# EAGLE board multipleBoards_V1 (EAGLE 5.11)
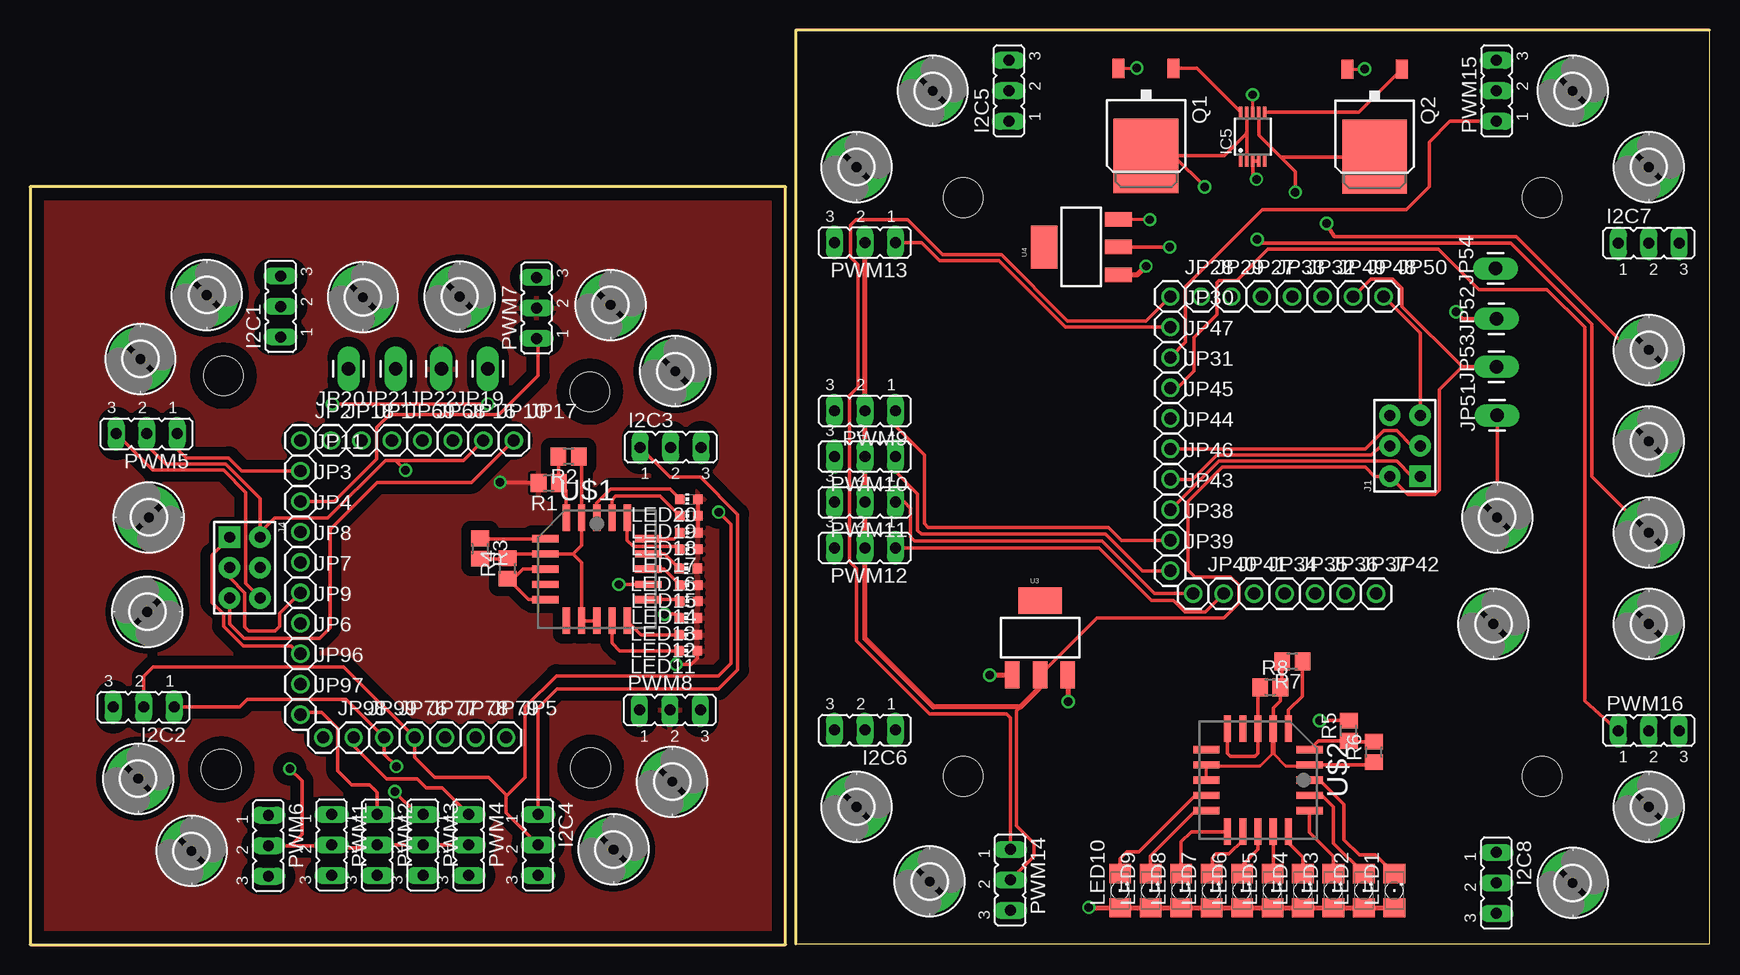
[diagram p0: board, top side]
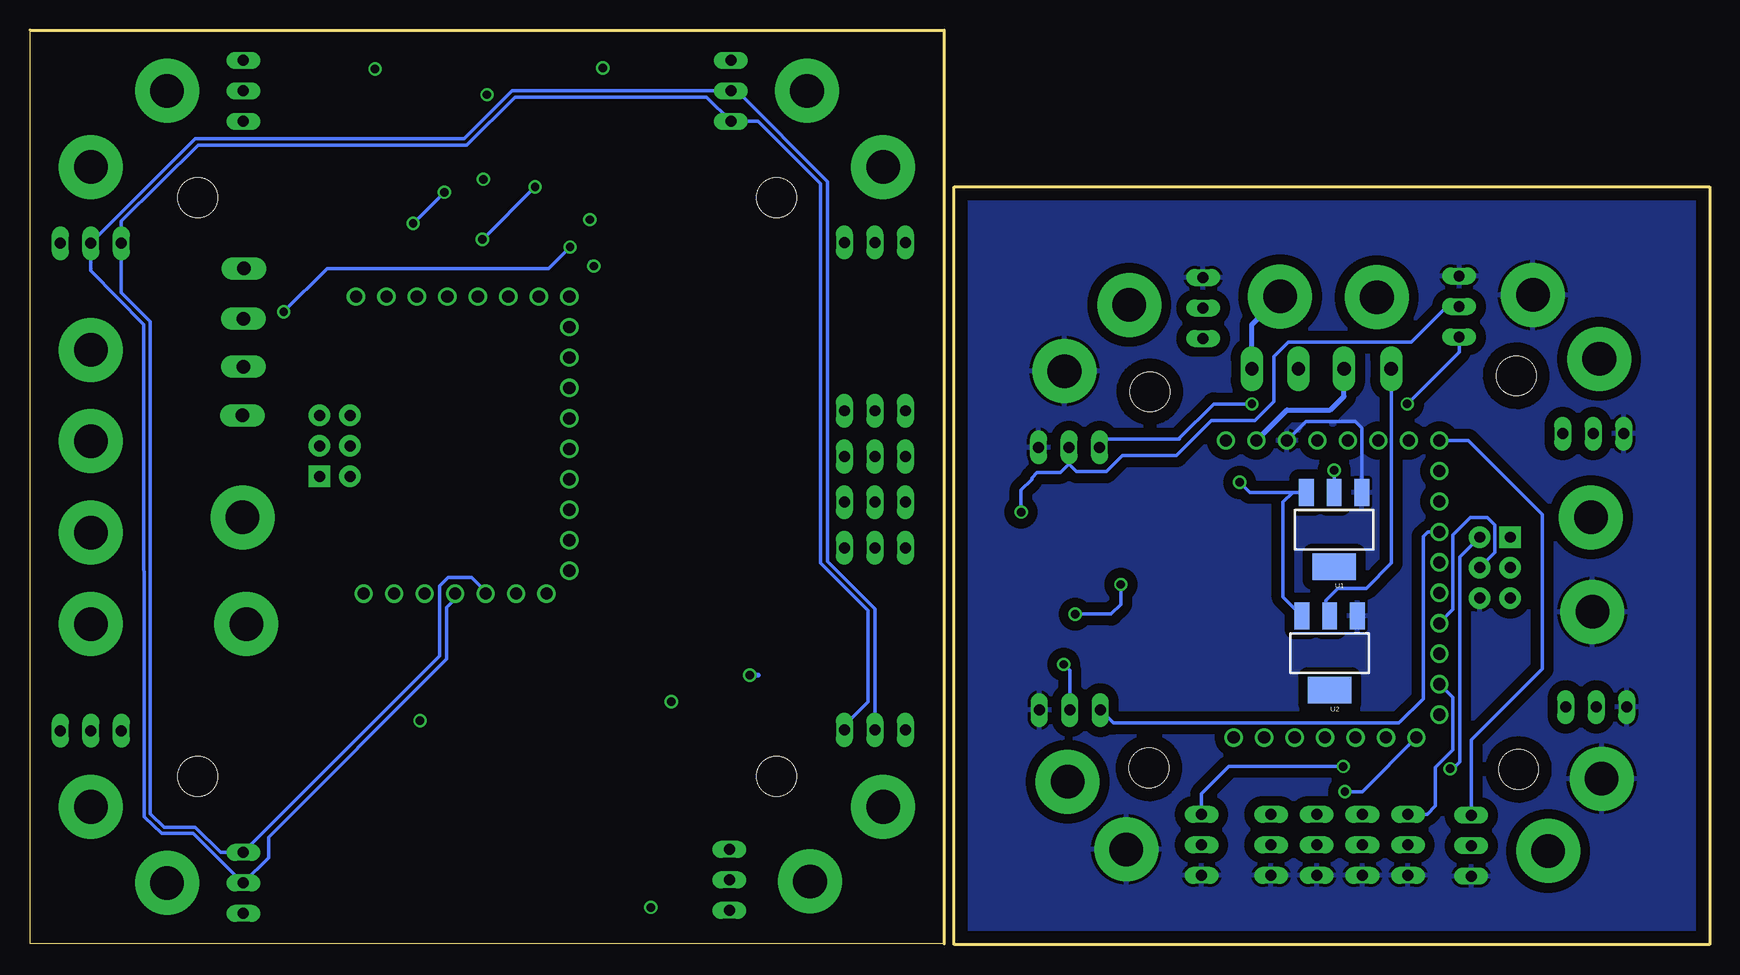
[diagram p1: board, bottom side, seen from below]

Size 140.02 x 76.26 mm. Coordinates in mm from the lower left corner, seen from the top.
Outline: 0,0 62.99,0 62.99,63.18 0,63.18 0,0
Outline: 63.82,0.06 140.02,0.06 140.02,76.26 63.82,76.26 63.82,0.06
Copper layers (1*16): Top 0.035mm / dielectric 1.5mm / Bottom 0.035mm
Design rules "default": minimum track width 10mil, minimum drill 24mil, track to track 8mil, track to pad 8mil, pad to pad 8mil, via to via 8mil, smd to smd 8mil, copper to edge 40mil, drill to drill 8mil, minimum pad ring 10mil, minimum via ring 8mil, stop-mask expansion 4mil, vias tented up to drill 0mil, thermal gap 10mil

## Footprints (pad centres in the part's own frame; a part is rotated, then mirrored left to right if it is on the bottom)
2,8-PAD = drill 2.8 pad 5.334 round: B2,8 0,0
JP2 = drill 0.914 long: 1 -2.54,0; 2 0,0; 3 2.54,0
MSOP10 = smd 0.31 x 0.9: 1 -1,-2.05; 2 -0.5,-2.05; 3 0,-2.05; 4 0.5,-2.05; 5 1,-2.05; 6 1,2.05; 7 0.5,2.05; 8 0,2.05; 9 -0.5,2.05; 10 -1,2.05
HEAD3X2 = drill 0.914 pad 1.778 square: 1 0,0 | drill 0.914 pad 1.778 round: 2 0,2.54; 3 2.54,0; 4 2.54,2.54; 5 5.08,0; 6 5.08,2.54
1X01 = drill 1.016 round: 1 0,0
STAND-OFF = hole 3.302: 0,0
1X01_LONGPAD = drill 1.118 pad 1.88 long: 1 0,0
1206 = smd 1.6 x 1.803: A -1.422,0; C 1.422,0
CHIP-LED0603 = smd 0.8 x 0.8: A 0,-0.75; C 0,0.75
D-PAK_TO252AA = smd 1 x 1.6: 1 -2.28,-4.8; 3 2.28,-4.8 | smd 5.4 x 6.2: 4 0,2.5
R0805 = smd 1.3 x 1.5: 1 -0.85,0; 2 0.85,0
SOT223 = smd 1.219 x 2.235: 1 -2.311,-3.099; 2 0,-3.099; 3 2.311,-3.099 | smd 3.6 x 2.2: 4 0,3.099
PLCC20S = smd 0.6 x 2.2: 1 0,4.3; 2 -1.27,4.3; 3 -2.54,4.3; 9 -2.54,-4.3; 10 -1.27,-4.3; 11 0,-4.3; 12 1.27,-4.3; 13 2.54,-4.3; 19 2.54,4.3; 20 1.27,4.3 | smd 2.2 x 0.6: 4 -4.3,2.54; 5 -4.3,1.27; 6 -4.3,0; 7 -4.3,-1.27; 8 -4.3,-2.54; 14 4.3,-2.54; 15 4.3,-1.27; 16 4.3,0; 17 4.3,1.27; 18 4.3,2.54

## Placement (x,y rotation side)
H1  MOUNT-PAD-ROUND2.8  [2,8-PAD]  9.91,35.62 270 top
H2  MOUNT-PAD-ROUND2.8  [2,8-PAD]  9.78,27.75 270 top
H3  MOUNT-PAD-ROUND2.8  [2,8-PAD]  53.53,13.59 0 top
H4  MOUNT-PAD-ROUND2.8  [2,8-PAD]  48.64,7.94 0 top
H5  MOUNT-PAD-ROUND2.8  [2,8-PAD]  48.39,53.34 0 top
H6  MOUNT-PAD-ROUND2.8  [2,8-PAD]  53.78,47.82 0 top
H7  MOUNT-PAD-ROUND2.8  [2,8-PAD]  9.21,48.83 0 top
H8  MOUNT-PAD-ROUND2.8  [2,8-PAD]  14.73,54.17 0 top
H9  MOUNT-PAD-ROUND2.8  [2,8-PAD]  13.46,7.81 0 top
H10  MOUNT-PAD-ROUND2.8  [2,8-PAD]  9.02,13.84 0 top
H11  MOUNT-PAD-ROUND2.8  [2,8-PAD]  134.94,11.49 0 top
H12  MOUNT-PAD-ROUND2.8  [2,8-PAD]  128.59,5.14 0 top
H13  MOUNT-PAD-ROUND2.8  [2,8-PAD]  27.75,53.98 0 top
H14  MOUNT-PAD-ROUND2.8  [2,8-PAD]  134.94,34.35 0 top
H15  MOUNT-PAD-ROUND2.8  [2,8-PAD]  35.81,54.04 0 top
H16  MOUNT-PAD-ROUND2.8  [2,8-PAD]  134.94,26.73 0 top
H17  MOUNT-PAD-ROUND2.8  [2,8-PAD]  128.59,71.18 0 top
H18  MOUNT-PAD-ROUND2.8  [2,8-PAD]  134.94,64.83 0 top
H19  MOUNT-PAD-ROUND2.8  [2,8-PAD]  68.9,64.83 0 top
H20  MOUNT-PAD-ROUND2.8  [2,8-PAD]  75.25,71.18 0 top
H21  MOUNT-PAD-ROUND2.8  [2,8-PAD]  74.99,5.27 0 top
H22  MOUNT-PAD-ROUND2.8  [2,8-PAD]  68.9,11.49 0 top
H23  MOUNT-PAD-ROUND2.8  [2,8-PAD]  134.94,49.59 0 top
H24  MOUNT-PAD-ROUND2.8  [2,8-PAD]  134.94,41.97 0 top
H25  MOUNT-PAD-ROUND2.8  [2,8-PAD]  122.3,35.62 0 top
H26  MOUNT-PAD-ROUND2.8  [2,8-PAD]  121.98,26.73 0 top
I2C1  [JP2]  20.89,53.21 90 top
I2C2  [JP2]  9.46,19.81 180 top
I2C3  [JP2]  53.4,41.47 0 top
I2C4  [JP2]  42.35,8.32 270 top
I2C5  [JP2]  81.6,71.18 90 top
I2C6  [JP2]  69.6,17.91 180 top
I2C7  [JP2]  134.94,58.48 0 top
I2C8  [JP2]  122.24,5.14 270 top
IC5  LTC4416EMS  [MSOP10]  101.92,67.37 0 top
J1  HEAD3X2  [HEAD3X2]  115.89,39.05 90 top
J4  HEAD3X2  [HEAD3X2]  16.64,33.97 270 top
JP1  M01PTH  [1X01]  27.62,42.04 0 top
JP2  M01PTH  [1X01]  22.54,42.04 0 top
JP3  M01PTH  [1X01]  22.54,36.96 0 top
JP4  M01PTH  [1X01]  22.54,34.42 0 top
JP5  M01PTH  [1X01]  39.69,17.27 0 top
JP6  M01PTH  [1X01]  22.54,24.26 0 top
JP7  M01PTH  [1X01]  22.54,29.34 0 top
JP8  M01PTH  [1X01]  22.54,31.88 0 top
JP9  M01PTH  [1X01]  22.54,26.8 0 top
JP10  M01PTH  [1X01]  37.78,42.04 0 top
JP11  M01PTH  [1X01]  22.54,39.5 0 top
JP12  STAND-OFF  [STAND-OFF]  46.74,14.73 0 top
JP13  STAND-OFF  [STAND-OFF]  15.94,14.61 0 top
JP14  STAND-OFF  [STAND-OFF]  46.67,46.1 0 top
JP15  STAND-OFF  [STAND-OFF]  16.13,47.43 0 top
JP16  M01PTH  [1X01]  35.24,42.04 0 top
JP17  M01PTH  [1X01]  40.32,42.04 0 top
JP18  M01PTH  [1X01]  25.08,42.04 0 top
JP19  M01PTH_LONGPAD  [1X01_LONGPAD]  38.16,48.01 180 top
JP20  M01PTH_LONGPAD  [1X01_LONGPAD]  26.54,48.01 180 top
JP21  M01PTH_LONGPAD  [1X01_LONGPAD]  30.48,48.01 180 top
JP22  M01PTH_LONGPAD  [1X01_LONGPAD]  34.29,48.01 180 top
JP23  STAND-OFF  [STAND-OFF]  126.05,14.03 0 top
JP24  STAND-OFF  [STAND-OFF]  77.79,14.03 0 top
JP25  STAND-OFF  [STAND-OFF]  126.05,62.29 0 top
JP26  STAND-OFF  [STAND-OFF]  77.79,62.29 0 top
JP27  M01PTH  [1X01]  100.14,54.04 0 top
JP28  M01PTH  [1X01]  95.06,54.04 0 top
JP29  M01PTH  [1X01]  97.6,54.04 0 top
JP30  M01PTH  [1X01]  95.06,51.5 0 top
JP31  M01PTH  [1X01]  95.06,46.42 0 top
JP32  M01PTH  [1X01]  105.22,54.04 0 top
JP33  M01PTH  [1X01]  102.68,54.04 0 top
JP34  M01PTH  [1X01]  102.04,29.27 0 top
JP35  M01PTH  [1X01]  104.58,29.27 0 top
JP36  M01PTH  [1X01]  107.12,29.27 0 top
JP37  M01PTH  [1X01]  109.66,29.27 0 top
JP38  M01PTH  [1X01]  95.06,33.72 0 top
JP39  M01PTH  [1X01]  95.06,31.18 0 top
JP40  M01PTH  [1X01]  96.96,29.27 0 top
JP41  M01PTH  [1X01]  99.5,29.27 0 top
JP42  M01PTH  [1X01]  112.2,29.27 0 top
JP43  M01PTH  [1X01]  95.06,36.26 0 top
JP44  M01PTH  [1X01]  95.06,41.34 0 top
JP45  M01PTH  [1X01]  95.06,43.88 0 top
JP46  M01PTH  [1X01]  95.06,38.8 0 top
JP47  M01PTH  [1X01]  95.06,48.96 0 top
JP48  M01PTH  [1X01]  110.3,54.04 0 top
JP49  M01PTH  [1X01]  107.76,54.04 0 top
JP50  M01PTH  [1X01]  112.84,54.04 0 top
JP51  M01PTH_LONGPAD  [1X01_LONGPAD]  122.3,44.13 90 top
JP52  M01PTH_LONGPAD  [1X01_LONGPAD]  122.24,52.2 90 top
JP53  M01PTH_LONGPAD  [1X01_LONGPAD]  122.24,48.2 90 top
JP54  M01PTH_LONGPAD  [1X01_LONGPAD]  122.17,56.39 90 top
JP68  M01PTH  [1X01]  32.7,42.04 0 top
JP69  M01PTH  [1X01]  30.16,42.04 0 top
JP76  M01PTH  [1X01]  29.53,17.27 0 top
JP77  M01PTH  [1X01]  32.07,17.27 0 top
JP78  M01PTH  [1X01]  34.61,17.27 0 top
JP79  M01PTH  [1X01]  37.15,17.27 0 top
JP96  M01PTH  [1X01]  22.54,21.72 0 top
JP97  M01PTH  [1X01]  22.54,19.18 0 top
JP98  M01PTH  [1X01]  24.45,17.27 0 top
JP99  M01PTH  [1X01]  26.99,17.27 0 top
LED1  [1206]  113.73,4.51 90 top
LED2  [1206]  111.19,4.51 90 top
LED3  [1206]  108.65,4.51 90 top
LED4  [1206]  106.11,4.51 90 top
LED5  [1206]  103.57,4.51 90 top
LED6  [1206]  101.03,4.51 90 top
LED7  [1206]  98.49,4.51 90 top
LED8  [1206]  95.95,4.51 90 top
LED9  [1206]  93.41,4.51 90 top
LED10  [1206]  90.87,4.51 90 top
LED11  [CHIP-LED0603]  54.86,24.51 90 top
LED12  [CHIP-LED0603]  54.86,25.84 90 top
LED13  [CHIP-LED0603]  54.86,27.24 90 top
LED14  [CHIP-LED0603]  54.93,28.64 90 top
LED15  [CHIP-LED0603]  54.93,29.97 90 top
LED16  [CHIP-LED0603]  54.86,31.37 90 top
LED17  [CHIP-LED0603]  54.93,32.96 90 top
LED18  [CHIP-LED0603]  54.93,34.35 90 top
LED19  [CHIP-LED0603]  54.93,35.75 90 top
LED20  [CHIP-LED0603]  54.93,37.15 90 top
PWM1  [JP2]  25.15,8.32 270 top
PWM2  [JP2]  28.96,8.32 270 top
PWM3  [JP2]  32.77,8.32 270 top
PWM4  [JP2]  36.58,8.32 270 top
PWM5  [JP2]  9.72,42.61 180 top
PWM6  [JP2]  19.88,8.26 270 top
PWM7  [JP2]  42.23,53.09 90 top
PWM8  [JP2]  53.34,19.56 0 top
PWM9  [JP2]  69.6,44.51 180 top
PWM10  [JP2]  69.6,40.7 180 top
PWM11  [JP2]  69.6,36.89 180 top
PWM12  [JP2]  69.6,33.08 180 top
PWM13  [JP2]  69.6,58.55 180 top
PWM14  [JP2]  81.72,5.4 270 top
PWM15  [JP2]  122.24,71.18 90 top
PWM16  [JP2]  134.94,17.84 0 top
Q1  IRFR5305  [D-PAK_TO252AA]  93.03,68.26 180 top
Q2  IRFR5305  [D-PAK_TO252AA]  112.08,68.2 180 top
R1  12K  [R0805]  43.24,38.48 180 top
R2  2.2K  [R0805]  44.89,40.7 180 top
R3  75K  [R0805]  37.53,33.02 270 top
R4  75K  [R0805]  39.81,31.37 90 top
R5  12K  [R0805]  109.92,17.84 90 top
R6  2.2K  [R0805]  112.01,16.07 90 top
R7  75K  [R0805]  105.22,23.62 180 top
R8  75K  [R0805]  103.38,21.46 0 top
U1  V_REG_317SMD  [SOT223]  31.31,34.61 180 bottom
U2  V_REG_317SMD  [SOT223]  31.69,24.32 180 bottom
U3  V_REG_317SMD  [SOT223]  84.2,25.59 0 top
U4  V_REG_317SMD  [SOT223]  87.63,58.17 90 top
U$1  LM3914SMD  [PLCC20S]  47.24,31.31 0 top
U$2  LM3914SMD  [PLCC20S]  102.36,13.72 270 top

## Library data of the parts
H1-H26 = holes
I2C1-I2C8 PWM1-PWM16 = jumper
IC5 = linear-technology-3
J1 J4 = MyCON2
JP1-JP11 JP16-JP18 JP27-JP50 JP68 JP69 JP76-JP79 JP96-JP99 = DIYdrones3
JP12-JP15 JP19-JP26 JP51-JP54 U1-U4 = SparkFun
LED1-LED20 = led
Q1 Q2 = transistor-power
R1-R8 = resistor
U$1 U$2 = linear

## Nets
GND: H2.B2,8 H4.B2,8 H6.B2,8 H8.B2,8 H10.B2,8 I2C1.3 I2C2.3 I2C3.3 I2C4.3 J4.6 JP16.1 PWM1.3 PWM2.3 PWM3.3 PWM4.3 PWM5.3 PWM6.3 PWM7.3 PWM8.3 U1.1 U2.1
GND1: H12.B2,8 H16.B2,8 H18.B2,8 H20.B2,8 H22.B2,8 H24.B2,8 I2C5.3 I2C6.3 I2C7.3 I2C8.3 IC5.3 IC5.4 J1.6 JP49.1 PWM9.3 PWM10.3 PWM11.3 PWM12.3 PWM13.3 PWM14.3 PWM15.3 PWM16.3 U3.1 U4.1
N$1: R1.1 R2.2 U$1.3
N$2: LED11.C U$1.12
N$3: LED12.C U$1.13
N$4: LED14.C U$1.14
N$5: LED13.C U$1.15
N$6: R5.1 R6.2 U$2.3
N$7: LED15.C U$1.16
N$8: LED16.C U$1.17
N$9: LED18.C U$1.18
N$10: LED17.C U$1.19
N$11: LED19.C U$1.20
N$12: LED20.C U$1.1
N$13: R8.1 U$2.6 U$2.8
N$14: R3.1 U$1.4
N$15: R4.1 U$1.6 U$1.8
N$16: R7.1 U$2.4
N$17: LED10.C U$2.12
N$18: LED9.C U$2.13
N$19: LED8.C U$2.14
N$20: LED7.C U$2.15
N$21: LED6.C U$2.16
N$22: LED5.C U$2.17
N$23: LED4.C U$2.18
N$24: LED3.C U$2.19
N$25: LED2.C U$2.20
N$26: LED1.C U$2.1
N$27: IC5.10 Q1.1
N$28: IC5.6 Q2.1
PB0: JP8.1
PB1: J4.3 JP7.1
PB2: J4.4 JP9.1
PB3: J4.1 JP6.1
PB4: JP96.1 PWM1.1
PB5: JP97.1 PWM2.1
PB6: JP98.1 PWM3.1
PB7: JP99.1 PWM4.1
PB8: JP41.1 PWM12.1
PB9: JP38.1 PWM9.1
PB10: JP39.1 PWM10.1
PB11: JP40.1 PWM11.1
PB12: J1.1 JP43.1
PB13: J1.4 JP46.1
PB14: J1.3 JP44.1
PB15: JP45.1
PC1: JP42.1
PC6: JP5.1
PD0: I2C1.1 I2C2.1 I2C3.1 I2C4.1 JP76.1
PD1: I2C1.2 I2C2.2 I2C3.2 I2C4.2 JP77.1
PD2: JP78.1
PD3: JP79.1
PD4: I2C5.1 I2C6.1 I2C7.1 I2C8.1 JP34.1
PD5: I2C5.2 I2C6.2 I2C7.2 I2C8.2 JP35.1
PD6: JP37.1
PD7: JP36.1
PE: R2.1 R3.2 R4.2 U$1.2 U$1.5 U$1.10 U$1.11
PE0: JP68.1
PE1: JP69.1
PE2: R6.1 R7.2 R8.2 U$2.2 U$2.5 U$2.10 U$2.11
PE3: JP33.1
PE4: JP32.1
PH0: JP1.1
PH1: JP18.1
PH2: JP31.1 PWM16.1
PH3: JP2.1 PWM6.1
PH4: JP11.1 PWM5.1
PH5: JP3.1 PWM7.1
PH6: JP4.1 PWM8.1
PH7: JP30.1 PWM13.1
PH8: JP28.1 PWM14.1
PH9: JP29.1
PH10: JP27.1
PH11: JP47.1 PWM15.1
RESET: J4.5 JP17.1
RESET1: J1.5 JP50.1
V_BATT1: H14.B2,8 IC5.2 IC5.9 Q1.4
V_BATT2: H23.B2,8 IC5.7 Q2.4
VCC: H1.B2,8 H3.B2,8 H5.B2,8 H7.B2,8 H9.B2,8 H13.B2,8 JP22.1 LED11.A LED12.A LED13.A LED14.A LED15.A LED16.A LED17.A LED18.A LED19.A LED20.A PWM7.2 PWM8.2 R1.2 U1.3 U2.3
VCC1: H11.B2,8 H17.B2,8 H19.B2,8 H21.B2,8 H26.B2,8 IC5.8 JP54.1 LED1.A LED2.A LED3.A LED4.A LED5.A LED6.A LED7.A LED8.A LED9.A LED10.A PWM15.2 PWM16.2 Q1.3 Q2.3 R5.2 U3.3 U4.3
VCC_3V1: JP52.1 U4.2
VCC_3V3: JP20.1 U2.2
VCC_5V: J4.2 JP10.1 JP21.1 PWM1.2 PWM2.2 PWM3.2 PWM4.2 PWM5.2 PWM6.2 U1.2
VCC_5V1: J1.2 JP48.1 JP53.1 PWM9.2 PWM10.2 PWM11.2 PWM12.2 PWM13.2 PWM14.2 U3.2
VCC_12V: H15.B2,8 JP19.1
VCC_12V1: H25.B2,8 JP51.1

## Tracks (layer width: path | path; a pad name or v marks a point on that pad's centre or on a via)
GND
  Top 0.305: J4.6 17.97,30.1 17.97,37.72 16.13,39.56 10.22,39.56 PWM5.3
  Bottom 0.305: U1.1 28.99,43.09 29.53,43.62 33.66,43.62 JP16.1
  pour Bottom (isolate 0.813): -0.76,64.01 63.56,63.88 63.69,-0.7 -0.76,-0.83
GND1  (via drill 0.7)
  Top 0.305: IC5.4 IC5.3 101.92,64.14 v102.23,63.82
  Top 0.406: U4.1 92.3,55.85 v93.03,56.58 | U3.1 80.01,22.49 v80.01,22.48
  Bottom 0.406: v93.03,56.58 93.03,56.64 93.28,56.9 | v80.01,22.48 79.31,22.48
N$1
  Top 0.305: U$1.3 44.7,37.87 R1.1 44.04,38.53 R2.2
N$2
  Top 0.305: U$1.12 48.51,25.15 49.15,24.51 LED11.C
N$3
  Top 0.305: U$1.13 50.95,25.84 LED12.C
N$4
  Top 0.305: U$1.14 54.05,28.77 LED14.C
N$5  (via drill 0.7)
  Top 0.305: v49.09,30.04 U$1.15 | v52.9,27.56 53.8,27.56 LED13.C
  Bottom 0.305: v49.09,30.04 49.09,28.38 49.91,27.56 v52.9,27.56
N$6
  Top 0.305: R6.2 110,16.92 R5.1 107.4,16.99 U$2.3
N$7
  Top 0.305: U$1.16 52.84,31.3 LED15.C
N$8
  Top 0.305: U$1.17 52.91,32.58 LED16.C
N$9
  Top 0.305: U$1.18 53.67,33.85 LED18.C
N$10
  Top 0.305: U$1.19 49.78,33.72 50.29,33.21 53.92,33.21 LED17.C
N$11
  Top 0.305: U$1.20 48.51,37.08 48.83,37.4 52.53,37.4 LED19.C
N$12
  Top 0.305: U$1.1 47.24,36.83 48.39,37.97 53.35,37.97 LED20.C
N$13
  Top 0.305: R8.1 102.36,21.3 U$2.6 102.36,15.94 102.11,15.68 100.08,15.68 99.82,15.94 U$2.8
N$14
  Top 0.305: U$1.4 37.55,33.85 R3.1
N$15
  Top 0.305: U$1.8 41.57,28.77 R4.1 40.3,30.52 41.08,31.3 U$1.6
N$16
  Top 0.305: U$2.4 104.9,19.56 106.05,20.7 106.05,23.6 R7.1
N$17
  Top 0.305: U$2.12 97.16,12.45 92.46,7.75 91.44,7.75 90.87,7.18 LED10.C
N$18
  Top 0.305: U$2.13 97.16,11.18 93.41,7.43 LED9.C
N$19
  Top 0.305: U$2.14 96.79,9.42 95.95,8.57 LED8.C
N$20
  Top 0.305: U$2.15 101.09,8.7 99.95,7.56 98.87,7.56 98.55,7.24 98.55,5.99 LED7.C
N$21
  Top 0.305: U$2.16 102.36,7.94 101.09,6.67 101.09,5.99 LED6.C
N$22
  Top 0.305: U$2.17 103.63,5.99 LED5.C
N$23
  Top 0.305: U$2.18 104.9,8.51 106.11,7.3 LED4.C
N$24
  Top 0.305: U$2.19 106.66,9.35 108.65,7.37 LED3.C
N$25
  Top 0.305: U$2.20 107.7,12.45 108.65,11.49 108.65,8.47 LED2.C
N$26
  Top 0.305: U$2.1 107.51,13.72 109.54,11.68 109.54,8.76 110.81,7.49 112.17,7.49 LED1.C
N$27
  Top 0.305: Q1.1 97.28,73.06 IC5.10
N$28
  Top 0.305: IC5.6 110.78,69.42 Q2.1
PB1
  Top 0.305: JP7.1 22.54,29.27 22.48,29.27 20.83,27.62 20.83,26.54 20.45,26.16 18.22,26.16 17.91,26.48 17.91,29.34 16.64,30.61 J4.3
PB2
  Bottom 0.305: J4.4 17.91,32.7 17.91,34.99 18.54,35.62 19.94,35.62 21.4,34.16 21.4,27.94 JP9.1
PB3
  Top 0.305: JP6.1 22.42,24.26 21.78,24.89 17.78,24.89 16.13,26.54 16.13,27.56 15.18,28.51 15.18,32.51 J4.1
PB4
  Bottom 0.305: JP96.1 22.48,21.72 21.4,20.64 21.4,16.26 22.86,14.8 22.86,11.56 23.56,10.86 PWM1.1
PB5
  Top 0.305: PWM2.1 28.96,12.7 28.32,13.34 26.8,13.34 25.65,14.48 25.65,18.03 24.32,19.37 22.73,19.37 JP97.1
PB6  (via drill 0.7)
  Top 0.305: PWM3.1 32.32,10.86 v30.42,12.76
  Bottom 0.305: v30.42,12.76 28.96,12.76 JP98.1
PB7
  Top 0.305: JP99.1 26.99,16.57 29.72,13.84 32.26,13.84 33.02,13.08 34.35,13.08 PWM4.1
PB8
  Top 0.305: PWM12.1 89.09,33.08 93.47,28.7 95.31,28.7 96.27,27.75 97.98,27.75 JP41.1
PB9
  Top 0.305: JP38.1 91,33.72 89.92,34.8 74.87,34.8 74.55,35.12 74.55,40.83 72.14,43.24 PWM9.1
PB10
  Top 0.305: JP39.1 92.71,31.18 89.66,34.23 74.3,34.23 73.98,34.54 73.98,37.59 72.14,39.43 PWM10.1
PB11
  Top 0.305: JP40.1 93.73,29.27 89.34,33.66 73.72,33.66 73.41,33.97 73.41,36.39 72.9,36.89 PWM11.1
PB12
  Top 0.305: J1.1 115.19,39.05 113.92,40.32 99.12,40.32 JP43.1
PB13
  Top 0.305: J1.4 112.59,41.59 111.82,40.83 98.93,40.83 96.9,38.8 JP46.1
PB14
  Top 0.305: J1.3 115.19,41.59 113.92,42.86 112.84,42.86 111.32,41.34 JP44.1
PD0  (via drill 0.7)
  Top 0.305: I2C4.1 42.35,19.75 43.94,21.34 57.4,21.34 58.99,22.92 58.99,35.88 55.88,38.99 53.34,38.99 I2C3.1 | v30.54,14.86 29.53,15.88 JP76.1 26.35,20.45 18.1,20.45 17.46,19.81 I2C2.1 | v38.16,45.09 v25.21,45.09
  Bottom 0.305: v30.54,14.86 40.07,14.86 42.35,12.57 I2C4.1 | I2C3.1 50.16,42.16 44.2,42.16 44.2,42.23 41.34,45.09 v38.16,45.09 | I2C1.1 20.89,49.4 v25.21,45.09
PD1  (via drill 0.7)
  Top 0.305: 39.69,12.38 39.69,12.51 38.23,13.97 33.72,13.97 32.07,15.62 JP77.1 26.16,23.18 10.29,23.18 9.46,22.35 I2C2.2 | 39.69,12.38 39.69,10.99 I2C4.2 | 39.69,12.38 41.27,13.97 41.27,19.81 43.88,22.42 57.4,22.42 58.42,23.43 58.42,35.05 v57.4,36.07
  Bottom 0.305: 53.4,40.07 I2C3.2 | 53.4,40.07 54.1,39.37 56.07,39.37 56.52,38.92 56.52,38.8 57.4,37.91 v57.4,36.07 | 53.4,40.07 52.77,39.43 50.29,39.43 48.96,40.77 44.45,40.77 41.53,43.69 37.91,43.69 36.32,45.28 36.32,49.02 35.12,50.23 24.89,50.23 21.91,53.21 I2C1.2
PD4
  Bottom 0.305: I2C6.1 72.14,18.29 70.17,20.26 70.17,27.88 74.1,31.81 74.1,63.44 79.31,68.64 I2C5.1 83.63,70.67 99.57,70.67 103.63,66.67 125.98,66.67 132.4,60.33 I2C7.1 132.4,54.36 129.98,51.94 129.98,10.92 128.84,9.78 126.24,9.78 124.14,7.68 I2C8.1 105.85,24.07 105.85,29.91 105.16,30.61 103.19,30.61 102.04,29.46 JP34.1
PD5
  Bottom 0.305: I2C6.2 69.6,28 73.53,31.94 73.53,63.63 81.09,71.18 I2C5.2 99.82,71.18 103.82,67.18 126.24,67.18 I2C7.2 134.94,56.2 130.56,51.69 130.49,10.67 129.03,9.27 126.43,9.27 122.3,5.14 I2C8.2 120.14,7.24 120.14,8.95 105.28,23.81 105.28,28.13 104.58,28.83 JP35.1
PE
  Top 0.305: R3.2 39.77,32.17 R4.2 40.17,32.58 U$1.5 45.28,32.58 | U$1.11 U$1.10 45.97,31.88 45.28,32.58 | 45.28,32.58 45.97,33.27 U$1.2 45.97,40.47 R2.1
PE2
  Top 0.254: U$2.11 U$2.10 | 103.63,16 102.55,14.92 98.13,14.92 | U$2.5 103.63,15.94 104.65,14.92 106.6,14.92
  Top 0.305: U$2.2 111.78,14.99 R6.1 | R7.2 104.37,21.61 R8.2 104.23,20.34 103.63,19.75 U$2.5
  Top 0.406: 103.63,16 U$2.5 | U$2.10 98.13,14.92 | 106.6,14.92 U$2.2
PH2
  Top 0.305: PWM16.1 129.6,20.32 129.6,51.5 126.43,54.61 120.78,54.61 117.41,57.98 103.19,57.98 100.58,55.37 99.12,55.37 98.93,55.18 98.93,52.51 97.03,50.61 97.03,47.82 95.63,46.42 JP31.1
PH3
  Bottom 0.305: PWM6.1 19.88,17.08 13.97,22.99 13.97,35.88 20.13,42.04 JP2.1
PH4
  Top 0.305: JP11.1 17.65,39.5 16.57,40.58 13.02,40.58 12.26,41.34 PWM5.1
PH5
  Top 0.305: PWM7.1 42.35,50.42 42.35,47.43 39.12,44.2 29.97,44.2 28.89,43.12 28.89,40.51 25.34,36.96 JP3.1
PH6
  Bottom 0.305: JP4.1 23.5,34.42 23.88,34.04 23.88,20.51 25.91,18.48 49.72,18.48 PWM8.1
PH7
  Top 0.305: PWM13.1 74.3,58.55 75.82,57.02 80.77,57.02 86.3,51.5 JP30.1
PH8
  Top 0.305: PWM14.1 81.72,18.92 81.41,19.24 74.99,19.24 68.9,25.34 68.9,31.37 68.33,31.94 68.33,45.78 69.02,46.48 69.02,56.71 68.39,57.34 68.39,60.01 68.83,60.45 73.15,60.45 76.07,57.53 80.96,57.53 86.49,52.01 93.03,52.01 JP28.1
PH11
  Top 0.305: PWM15.1 118.36,68.64 116.65,66.93 116.65,63.18 114.74,61.28 102.74,61.28 96.33,54.86 96.33,50.23 JP47.1
RESET
  Top 0.305: J4.5 16.64,26.73 17.84,25.53 24.13,25.53 25.02,26.42 25.02,34.61 28.96,38.54 36.83,38.54 JP17.1
RESET1
  Top 0.305: J1.5 115.89,50.99 JP50.1
V_BATT1  (via drill 0.7)
  Top 0.305: IC5.9 IC5.2 101.42,67.68 101.41,67.69 101.41,67.63 99.57,65.79 93.05,65.79 Q1.4 95.34,65.76 v97.92,63.18 | H14.B2,8 134.87,34.35 130.17,39.05 130.17,51.75 123.44,58.48 102.62,58.48 v102.3,58.8
  Bottom 0.305: v97.92,63.18 v102.3,58.8
V_BATT2  (via drill 0.7)
  Top 0.305: IC5.7 102.42,67.51 104.27,65.66 | 104.27,65.66 112.04,65.66 Q2.4 | H23.B2,8 133.35,49.59 123.89,59.05 108.71,59.05 v108.08,60.13 | v105.47,62.74 105.47,64.45 104.27,65.66
  Bottom 0.305: v105.47,62.74 v108.08,60.13
VCC  (via drill 0.7)
  Top 0.305: v39.18,38.54 42.33,38.54 R1.2 | LED16.A 55.68,31.43 | LED18.A LED19.A LED20.A | LED11.A 55.63,24.5 55.63,23.88 55.12,23.37 v53.85,23.37
  Bottom 0.305: 34.75,37.71 38.34,37.71 v39.18,38.54 | 34.75,37.71 U1.3 | 34.75,37.71 35.56,36.89 35.56,28.98 U2.3 | PWM8.2 53.34,22.86 v53.85,23.37
  pour Top (isolate 0.813): -0.7,63.94 63.18,63.82 63.63,-0.76 -0.57,-0.7
VCC1  (via drill 0.7)
  Top 0.254: IC5.8 v101.92,70.87 | Q2.3 111.25,73 v111.25,73.03 | Q1.3 92.27,73.06 v92.27,73.09 | U4.3 93.34,60.48 v93.34,60.45
  Top 0.305: R5.2 107.53,18.69 v107.51,18.67
  Top 0.406: v88.27,3.11 88.27,3.09 LED10.A LED9.A LED8.A LED7.A LED6.A LED5.A LED4.A LED3.A LED2.A LED1.A | U3.3 86.55,22.49 v86.55,20.26
VCC_3V1  (via drill 0.7)
  Top 0.305: JP52.1 119.44,52.2 v118.87,52.77 | U4.2 v95,58.17
  Bottom 0.305: v118.87,52.77 115.25,56.39 96.77,56.39 v95,58.17
VCC_3V3
  Bottom 0.305: JP20.1 26.54,31.81 28.64,29.72 30.99,29.72 32,28.7 32,27.74 U2.2
VCC_5V  (via drill 0.7)
  Top 0.305: PWM4.2 PWM3.2 PWM2.2 29.15,8.32 29.21,8.26 29.08,8.26 28.89,8.06 25.4,8.06 PWM1.2 25.08,8.26 PWM6.2 21.72,8.26 22.67,9.21 22.67,13.65 v21.65,14.67 | PWM5.2 9.72,41.66 11.3,40.07 16.32,40.07 19.18,37.21 J4.2 19.18,34.35 20.38,35.56 24.83,35.56 29.65,40.39 30.48,40.39 | JP10.1 36.13,40.39 30.48,40.39 | 30.48,40.39 v31.31,39.56
  Bottom 0.305: v21.65,14.67 21.4,14.67 20.83,15.24 20.83,32.32 J4.2 | U1.2 30.92,38.09 31.31,38.47 v31.31,39.56
  Bottom 0.406: JP21.1 30.48,45.72 31.62,44.58 35.24,44.58 JP10.1
VCC_5V1
  Top 0.305: 119.38,48.2 JP53.1 | 119.38,48.2 114.36,53.21 114.36,54.74 113.6,55.5 111.76,55.5 JP48.1 | 119.38,48.2 117.47,46.29 117.47,37.91 117.09,37.53 114.87,37.53 J1.2 112.08,39.05 111.32,39.81 99.38,39.81 96.52,36.96 96.52,31.24 97.09,30.67 100.08,30.67 100.77,29.97 100.77,28.51 99.5,27.24 88.95,27.24 U3.2 | PWM14.2 83.69,7.37 83.69,8.45 82.23,9.91 82.23,19.49 82.55,19.81
  Top 0.406: PWM13.2 PWM9.2 PWM10.2 PWM11.2 PWM12.2 69.6,25.53 75.31,19.81 82.55,19.81 84.2,21.46 U3.2
VCC_12V
  Bottom 0.406: JP19.1 38.16,51.69 H15.B2,8
VCC_12V1
  Top 0.305: H25.B2,8 JP51.1

## Text on the board
Document: VCC | GND | VCC | I2C | GND | pwm | pwm | 5V REG | VCC | I2C | 3.3V | 5V | batt_2 + | pwm | 12V | pwm | 12V + | batt_2 - | pwm | programmer | pwm | batt_1 + | 3.3V REG | 75K | batt_1 + | 12V - | pwm | 75K | I2C | 12K | 2.2K | cathode | GND | VCC | I2C | pwm | VCC | anode | GND
Reference: VCC | GND
tDocu: 12V Boost | PWM | Batt Out | GND | VCC | GND | VCC | 5V | 3.3V | I2C | 12V | Batt | PWM | 2.2K | I2C | VCC | 12K | Anode | BatteryInput | 75K | 75K | GND | I2C | PWM | GND | VCC | VCC | GND | I2C | PWM | PWM RC Controller
bDocu: 5 Reg | 3.3 Reg